# Altium PCB Lite Carrier for Mu.PcbDoc (part 11 of 15)
Units mm, origin at the board's own origin, x right, y up, seen from the top; angles counter-clockwise.
Board outline 146 x 102 mm, 20 copper layers (F.Cu, F.Mask, B.Cu, B.Mask, In1.Cu, F.SilkS, In2.Cu, B.SilkS, F.Adhes, B.Adhes, F.Paste, B.Paste, Dwgs.User, Cmts.User, Eco1.User, Eco2.User, Edge.Cuts, Margin, B.CrtYd, F.CrtYd); 254 components, 382 nets, 1258 pads, 1020 vias.
Unrouted connection lines stored in the file: 113.
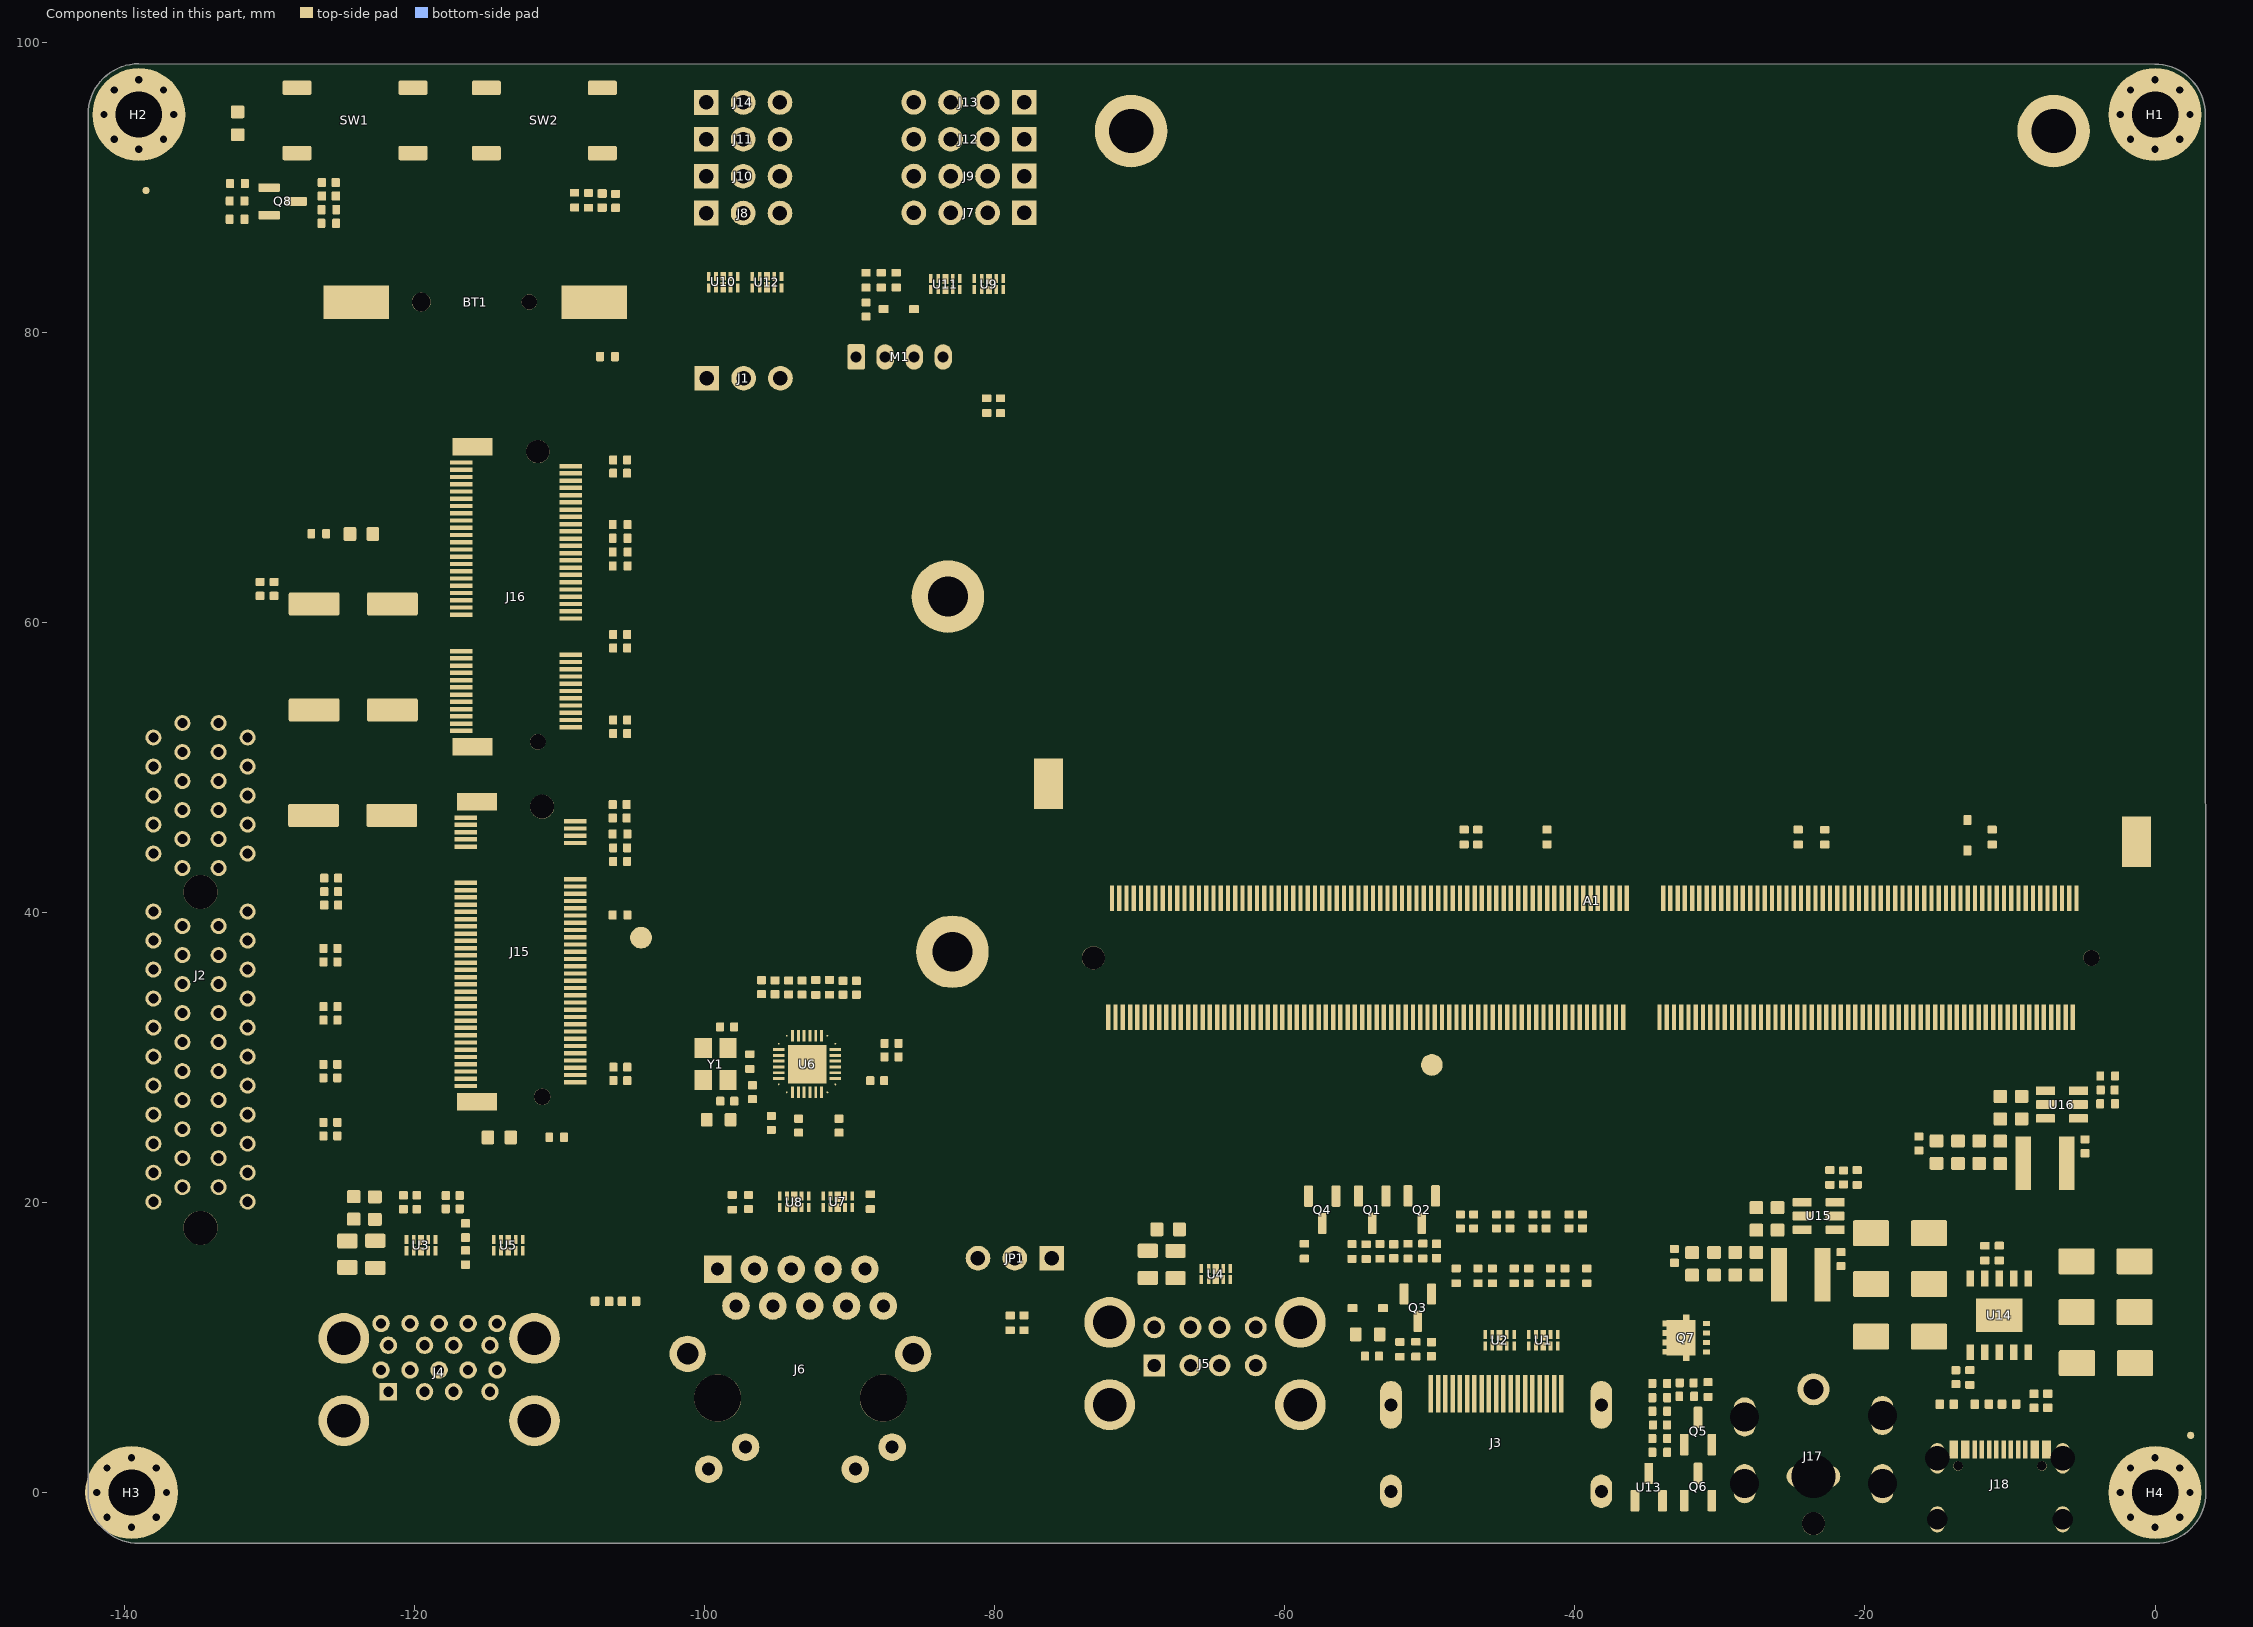
[diagram p21: the components of this part, seen from the top]

## Via types
v1: diameter 0.4, hole 0.2, F.Cu to B.Cu, tented both sides, 952 vias
v2: diameter 0.5, hole 0.3, F.Cu to B.Cu, tented both sides, 68 vias

## Nets (pads, with @x,y where several pads share a name; then routed paths per layer and width w, separated by ;. In a path a pad name is that pad's centre, name@x,y a point inside that pad or via, vN(x,y) a via of type N, cw(c..) or ccw(c..) an arc to the next point about the centre after c; other vN are vias at no path point) (continued)
copper on no net: | length 5303.1
  F.SilkS w0.254: -73.59,40.36 -73.59,97.36 -3.99,97.36 -3.99,40.36 -73.59,40.36
  B.SilkS w0.254: -91.788,51.904 -85.383,51.904 ; -91.788,52.631 -85.383,52.565 -91.788,52.499 ; -89.081,46.753 -88.09,46.819 -89.081,46.885 ; -89.081,48.338 -88.09,48.338 ; -89.081,49.064 -88.09,49.13 -89.081,49.197 ; -89.081,49.791 -88.09,49.791 ; -89.081,50.385 -88.09,50.385 ; -88.09,47.546 -89.081,47.612 ; -88.09,48.14 -89.081,48.206 ; -88.09,48.668 -89.081,48.602 ; -88.09,48.866 -89.081,48.932 ; -88.09,49.329 -89.081,49.395 ; -88.09,49.989 -89.081,50.055 ; -88.09,50.187 -89.081,50.253 ; -88.09,50.583 -89.081,50.649 ; -88.09,51.31 -89.081,51.376 -88.09,51.442 -89.081,51.508 ; -85.383,52.234 -91.788,52.168 ; -84.854,48.14 -83.864,48.206 -84.854,48.272 ; -84.854,48.932 -83.864,48.932 ; -84.854,51.046 -83.864,51.046 ; -84.524,52.432 -78.316,52.432 ; -84.392,46.885 -78.448,46.885 ; -84.392,52.499 -78.448,52.499 ; -84.26,46.819 -78.646,46.819 ; -84.26,52.565 -78.58,52.565 ; -83.996,52.631 -78.845,52.631 ; -83.93,46.753 -78.977,46.753 ; -83.864,47.876 -84.854,47.81 ; -83.864,48.074 -84.854,48.008 ; -83.864,49.13 -84.854,49.197 ; -83.864,49.725 -84.854,49.659 ; -83.864,49.923 -84.854,49.857 ; -83.864,51.376 -84.854,51.442 ; -83.864,51.838 -84.854,51.772 ; -82.873,44.772 -81.024,44.706 -82.873,44.64 -81.024,44.574 -81.354,44.574 ; -81.024,44.177 -81.354,44.244 ; -81.024,44.376 -81.354,44.442 ; -80.562,44.177 -80.165,44.111 -80.496,44.045 -78.713,44.045 -80.496,43.913 -78.713,43.847 -80.364,43.847 ; -80.165,44.244 -80.562,44.31 ; -80.165,44.442 -80.562,44.508 ; -80.165,44.904 -78.713,44.904 ; -80.099,43.253 -80.628,43.187 ; -80.033,44.64 -80.496,44.64 -78.713,44.64 -79.043,44.64 -78.713,44.574 ; -79.043,43.121 -78.713,43.121 ; -78.977,47.744 -77.986,47.744 ; -78.977,48.602 -77.986,48.536 -78.977,48.47 ; -78.977,49.593 -77.986,49.593 ; -78.977,51.112 -77.986,51.178 -78.977,51.244 ; -78.713,43.319 -79.043,43.385 ; -78.713,43.517 -79.043,43.583 -78.713,43.649 -79.043,43.715 ; -78.713,44.244 -79.043,44.177 ; -78.118,43.451 -77.788,43.451 ; -78.118,43.913 -77.788,43.913 ; -78.118,44.31 -77.788,44.244 -78.118,44.177 ; -78.118,44.904 -77.788,44.838 -78.118,44.772 ; -78.052,51.838 -78.977,51.772 ; -77.986,48.338 -78.977,48.272 ; -77.986,48.668 -78.977,48.734 ; -77.986,49.395 -78.977,49.329 ; -77.986,51.376 -78.977,51.442 ; -77.854,43.121 -76.401,43.121 ; -77.788,44.508 -78.118,44.442 ; -77.194,51.376 -76.137,51.376 ; -77.128,51.838 -75.807,51.838 ; -76.731,46.951 -71.118,46.885 -76.533,46.885 ; -76.731,52.499 -71.118,52.499 -76.929,52.366 ; -76.599,49.923 -71.118,49.923 ; -76.599,52.565 -71.118,52.631 -76.335,52.631 ; -76.533,49.725 -71.118,49.659 -76.731,49.659 -71.118,49.593 ; -76.533,70.395 -73.826,70.395 ; -76.467,43.517 -77.788,43.385 -78.118,43.319 -76.203,43.319 -76.467,43.385 -76.137,43.451 ; -76.467,49.857 -71.118,49.791 -76.335,49.791 ; -76.401,46.819 -71.118,46.819 -76.005,46.753 ; -76.269,71.65 -74.75,71.716 -76.137,71.716 -74.882,71.782 ; -76.203,48.932 -77.194,48.998 ; -76.137,43.583 -76.467,43.649 ; -76.137,44.177 -76.467,44.111 -76.137,44.045 -76.467,43.979 ; -76.137,44.64 -76.467,44.574 ; -76.137,47.81 -77.194,47.744 ; -76.137,50.715 -77.194,50.781 ; -76.137,51.178 -77.194,51.112 ; -76.071,49.263 -77.062,49.329 ; -75.939,47.612 -77.194,47.612 -71.118,47.546 ; -75.939,69.801 -75.014,69.801 ; -75.939,71.848 -75.014,71.848 ; -75.807,50.253 -76.995,50.187 -71.118,50.187 -72.109,50.319 ; -75.807,69.735 -75.146,69.735 ; -75.807,71.914 -75.146,71.914 ; -75.08,43.385 -74.684,43.385 ; -75.08,43.649 -74.684,43.715 -75.08,43.781 ; -75.08,44.111 -74.684,44.177 -75.08,44.244 ; -75.08,44.574 -74.684,44.574 ; -74.882,69.867 -76.137,69.933 -73.033,69.933 ; -74.684,43.583 -75.08,43.517 ; -74.684,43.913 -75.08,43.979 ; -74.684,44.376 -75.08,44.442 ; -74.684,69.867 -72.901,69.867 ; -74.354,69.669 -58.24,69.669 -74.552,69.801 -58.042,69.801 ; -74.354,71.056 -76.599,70.99 ; -74.222,69.603 -58.372,69.603 ; -73.958,70.461 -76.533,70.461 -74.156,70.593 -76.599,70.66 ; -73.892,44.64 -75.873,44.706 ; -73.693,69.273 -58.967,69.273 -73.561,69.207 ; -73.627,44.111 -73.297,44.177 -73.627,44.244 ; -73.627,44.376 -73.297,44.376 ; -73.627,44.772 -73.297,44.772 ; -73.363,43.121 -71.91,43.121 ; -73.297,43.517 -73.627,43.583 ; -73.297,43.847 -73.627,43.781 ; -73.297,44.045 -73.627,43.979 ; -73.297,44.574 -73.627,44.64 ; -73.297,62.405 -69.665,62.405 ; -73.297,62.603 -70.325,62.603 ; -73.297,62.801 -70.986,62.801 ; -73.297,62.999 -71.58,62.999 ; -73.297,63.197 -72.109,63.197 ; -73.297,64.122 -72.439,64.122 ; -73.297,64.716 -72.439,64.716 ; -73.297,65.376 -72.439,65.376 ; -73.297,65.64 -72.439,65.574 -73.297,65.508 ; -73.297,67.159 -59.363,67.159 ; -73.297,67.886 -59.363,67.82 -73.297,67.754 ; -73.297,68.15 -59.363,68.084 -73.297,68.018 ; -73.297,68.414 -59.363,68.48 -73.297,68.546 ; -73.297,68.81 -59.363,68.81 ; -73.297,70.065 -76.269,69.999 -73.165,69.999 ; -73.033,61.414 -59.627,61.414 -65.901,61.48 ; -72.901,61.282 -59.891,61.216 -72.769,61.216 -59.759,61.348 ; -72.769,69.867 -59.891,69.867 ; -72.637,61.15 -60.023,61.15 ; -72.439,63.791 -73.297,63.857 ; -72.439,64.914 -73.297,64.848 ; -72.439,65.971 -73.297,65.905 ; -72.439,70.065 -60.221,70.065 -72.637,69.933 -60.023,69.933 ; -72.109,48.404 -71.118,48.47 -72.109,48.536 ; -72.109,51.31 -71.118,51.376 -72.109,51.442 ; -72.109,60.82 -60.618,60.82 -71.976,60.754 ; -72.109,70.263 -60.552,70.263 ; -71.976,43.715 -71.646,43.715 ; -71.976,44.904 -71.646,44.904 ; -71.976,63.131 -73.297,63.131 -71.778,63.065 ; -71.976,70.329 -60.684,70.329 ; -71.712,43.187 -73.561,43.253 ; -71.646,43.385 -71.976,43.451 ; -71.646,44.177 -71.976,44.111 ; -71.646,44.376 -71.976,44.31 ; -71.646,44.706 -71.976,44.772 ; -71.646,60.555 -61.146,60.489 -71.514,60.489 ; -71.646,70.527 -61.014,70.527 -71.844,70.395 -60.816,70.395 ; -71.514,70.593 -61.146,70.593 ; -71.382,62.933 -73.297,62.933 -71.184,62.867 ; -71.184,60.291 -61.476,60.291 ; -71.184,70.792 -61.476,70.792 ; -71.118,47.149 -76.863,47.083 ; -71.118,47.347 -77.128,47.413 ; -71.118,49.064 -72.109,49.13 ; -71.118,49.263 -72.109,49.329 ; -71.118,50.121 -76.863,50.055 ; -71.118,50.98 -72.109,50.914 ; -71.118,51.838 -72.109,51.772 ; -71.052,60.225 -61.608,60.225 ; -71.052,70.858 -61.608,70.858 ; -70.788,62.735 -73.297,62.669 -70.524,62.669 ; -70.722,60.027 -61.938,60.027 ; -70.722,71.056 -61.938,71.056 ; -70.59,59.961 -62.07,59.961 ; -70.59,71.122 -62.07,71.122 ; -70.325,49.064 -69.335,49.13 -70.325,49.197 ; -70.325,49.857 -69.335,49.857 ; -70.325,51.046 -69.335,51.112 -70.325,51.178 -69.335,51.244 -70.325,51.31 ; -70.259,47.876 -69.335,47.876 ; -70.259,59.763 -62.401,59.763 ; -70.259,71.32 -62.401,71.32 ; -70.193,52.102 -63.589,52.168 -70.127,52.234 ; -70.127,59.697 -62.533,59.697 ; -70.127,62.537 -73.297,62.537 -69.929,62.471 ; -70.127,71.386 -62.533,71.386 ; -70.061,47.083 -63.655,47.083 ; -69.995,52.366 -63.721,52.366 ; -69.929,43.121 -69.599,43.187 -69.929,43.253 ; -69.929,44.111 -69.599,44.111 -70.722,44.045 -69.599,43.979 ; -69.797,46.885 -63.92,46.885 ; -69.797,59.499 -62.863,59.499 ; -69.731,52.565 -63.986,52.565 ; -69.665,46.819 -64.052,46.819 ; -69.599,43.385 -69.929,43.451 ; -69.599,71.716 -63.193,71.782 -69.467,71.782 ; -69.533,62.338 -73.297,62.338 -69.269,62.272 ; -69.467,59.301 -63.193,59.301 -69.599,59.367 -62.995,59.433 ; -69.401,52.631 -64.316,52.631 ; -69.335,46.753 -64.382,46.753 ; -69.335,48.074 -70.259,48.008 ; -69.335,48.404 -70.325,48.47 ; -69.335,48.998 -70.325,48.932 ; -69.335,49.329 -70.325,49.395 ; -69.335,49.527 -70.325,49.593 ; -69.335,50.055 -70.325,49.989 ; -69.335,50.649 -70.325,50.583 ; -69.335,50.98 -70.325,50.914 ; -69.335,51.706 -70.259,51.64 ; -69.335,59.235 -63.325,59.235 ; -69.335,71.848 -63.325,71.848 ; -69.071,62.206 -73.297,62.206 -68.873,62.14 ; -69.005,59.036 -63.655,59.036 -69.137,59.103 -63.457,59.169 ; -69.005,72.046 -63.589,71.98 -69.137,71.98 -63.457,71.914 ; -68.674,58.838 -64.052,58.838 -68.542,58.772 ; -68.674,62.074 -73.297,62.008 -68.41,62.008 ; -68.674,72.244 -63.986,72.244 ; -68.542,72.311 -64.118,72.311 ; -68.278,61.942 -73.297,61.876 -68.014,61.876 ; -68.212,58.574 -64.514,58.574 -68.08,58.508 ; -68.212,72.509 -64.448,72.509 -68.344,72.443 -64.25,72.377 ; -68.08,72.575 -64.58,72.575 ; -67.882,44.64 -66.033,44.64 -66.429,44.574 ; -67.816,61.81 -73.231,61.744 -67.618,61.744 ; -67.75,58.31 -64.91,58.31 ; -67.75,72.773 -64.91,72.773 ; -67.618,58.244 -65.042,58.244 ; -67.618,72.839 -65.042,72.839 ; -67.42,61.678 -73.165,61.612 -67.156,61.612 ; -67.288,43.913 -66.033,43.913 ; -67.288,58.046 -65.372,58.046 ; -67.288,73.037 -65.372,73.037 ; -67.156,75.282 -65.505,75.282 ; -66.957,57.848 -65.703,57.848 ; -66.957,61.546 -73.099,61.546 -66.759,61.48 ; -66.957,73.235 -65.703,73.235 -67.089,73.169 -65.505,73.103 ; -66.825,57.782 -65.835,57.782 ; -66.825,73.301 -65.835,73.301 ; -66.759,74.292 -65.901,74.226 -66.759,74.16 ; -66.759,77.131 -65.901,77.131 ; -66.693,57.716 -66.033,57.716 ; -66.561,77.197 -66.099,77.197 ; -66.429,43.715 -66.033,43.715 ; -66.033,43.517 -66.429,43.583 ; -66.033,44.111 -67.288,44.045 ; -65.901,73.895 -66.759,73.829 ; -65.901,74.358 -66.759,74.424 ; -65.901,74.952 -66.759,74.886 ; -65.769,77.065 -66.957,76.999 -65.637,76.999 -67.156,76.867 ; -65.703,61.546 -59.561,61.546 -65.505,61.612 ; -65.505,43.385 -65.174,43.385 ; -65.505,43.781 -65.174,43.847 -65.505,43.913 -63.391,43.847 -63.721,43.847 -65.174,43.715 ; -65.505,43.979 -63.391,44.045 -65.505,44.111 -63.391,44.177 -63.721,44.177 ; -65.505,44.838 -65.174,44.838 ; -65.372,75.48 -67.354,75.546 ; -65.372,76.735 -67.288,76.669 -65.306,76.603 -67.354,76.537 ; -65.306,61.678 -59.495,61.678 ; -65.24,75.811 -67.42,75.877 ; -65.24,76.405 -67.42,76.339 ; -65.174,44.31 -65.505,44.376 ; -65.174,44.64 -65.505,44.706 ; -65.108,61.744 -59.429,61.744 -64.844,61.81 ; -64.646,61.876 -59.363,61.942 -64.448,61.942 ; -64.382,47.612 -63.457,47.546 -70.259,47.546 -69.335,47.612 -70.259,47.744 ; -64.382,48.998 -63.391,48.998 ; -64.382,49.263 -63.391,49.329 -64.382,49.395 ; -64.382,49.527 -63.391,49.527 ; -64.382,51.178 -63.391,51.178 ; -64.382,58.64 -68.41,58.706 -64.25,58.706 ; -64.25,62.008 -59.363,62.074 -63.986,62.074 ; -63.92,58.904 -68.807,58.904 -63.787,58.97 ; -63.787,62.14 -59.363,62.206 -63.589,62.206 ; -63.523,52.036 -70.193,51.97 ; -63.457,47.942 -64.382,48.008 ; -63.457,51.838 -64.382,51.772 ; -63.391,43.649 -63.721,43.583 ; -63.391,44.244 -63.721,44.31 ; -63.391,44.706 -63.721,44.64 ; -63.391,48.404 -64.382,48.338 ; -63.391,49.197 -64.382,49.13 ; -63.391,49.857 -64.382,49.923 ; -63.391,50.319 -64.382,50.253 ; -63.391,50.517 -64.382,50.451 ; -63.391,50.98 -64.382,50.914 ; -63.391,51.376 -64.382,51.31 ; -63.391,62.272 -59.363,62.272 -63.193,62.338 ; -63.193,46.753 -61.608,46.819 -63.061,46.819 -61.542,46.885 ; -63.127,44.64 -61.146,44.64 ; -62.995,62.405 -59.363,62.405 -62.731,62.471 ; -62.995,71.65 -69.797,71.584 -62.863,71.584 ; -62.929,46.951 -61.41,47.017 -62.797,47.083 ; -62.599,49.923 -61.476,49.989 -62.599,50.055 ; -62.533,62.537 -59.363,62.537 ; -62.467,49.461 -56.589,49.461 ; -62.335,62.603 -59.363,62.603 -62.136,62.669 ; -62.269,43.517 -61.938,43.517 ; -62.203,52.499 -56.589,52.499 ; -62.136,49.197 -56.589,49.263 -62.335,49.329 ; -62.07,52.565 -56.589,52.565 -61.806,52.631 ; -62.004,49.13 -56.589,49.13 -61.74,49.064 ; -61.938,44.244 -62.269,44.177 ; -61.938,44.442 -62.269,44.376 ; -61.872,62.735 -59.363,62.801 -61.74,62.801 ; -61.806,47.942 -60.552,47.876 -61.938,47.81 ; -61.674,48.008 -60.353,48.008 ; -61.608,50.319 -62.599,50.385 ; -61.608,50.517 -62.599,50.583 -61.608,50.649 -62.599,50.715 ; -61.608,50.848 -62.599,50.914 ; -61.608,51.046 -62.599,51.112 ; -61.542,51.64 -62.599,51.574 ; -61.476,62.867 -59.363,62.867 -61.278,62.933 ; -61.344,49.857 -62.599,49.857 -56.589,49.857 -57.58,49.857 ; -61.344,51.838 -62.599,51.772 ; -61.212,47.215 -62.533,47.281 ; -61.08,62.999 -59.363,63.065 -60.882,63.065 ; -61.014,47.413 -62.335,47.479 ; -60.948,60.621 -71.778,60.621 -60.816,60.687 ; -60.882,48.734 -59.627,48.734 -60.75,48.8 ; -60.684,63.131 -59.363,63.197 -60.552,63.197 ; -60.485,60.886 -72.241,60.886 -60.353,60.952 ; -60.419,63.263 -59.363,63.263 ; -60.287,63.527 -59.363,63.461 -60.287,63.395 ; -60.287,64.848 -59.363,64.914 -60.287,64.98 ; -60.287,65.376 -59.363,65.376 ; -59.759,43.319 -57.91,43.253 -59.759,43.187 ; -59.693,44.64 -57.91,44.574 -58.24,44.574 ; -59.693,44.904 -57.91,44.904 ; -59.693,69.867 -57.91,69.867 -56.523,69.867 ; -59.561,69.933 -56.457,69.933 -59.429,69.999 -56.259,70.131 -59.231,70.131 ; -59.363,48.998 -60.618,48.932 ; -59.363,63.725 -60.287,63.659 ; -59.363,64.32 -60.287,64.386 ; -59.363,64.65 -60.287,64.716 ; -59.363,65.574 -60.287,65.508 ; -59.363,65.773 -60.287,65.707 ; -59.363,65.971 -60.287,66.037 ; -59.363,66.169 -73.297,66.235 ; -59.363,66.499 -73.297,66.565 ; -59.363,66.829 -73.297,66.895 ; -59.363,67.49 -73.297,67.424 ; -59.363,68.348 -73.297,68.282 ; -59.165,69.141 -73.429,69.141 -59.297,69.075 -73.297,68.942 ; -59.099,43.913 -57.91,43.847 -58.24,43.847 ; -59.099,70.197 -56.259,70.197 ; -58.834,69.339 -73.826,69.339 -58.702,69.405 ; -58.768,70.395 -56.127,70.395 ; -58.438,70.593 -56.061,70.593 -58.306,70.66 -56.061,70.726 ; -58.24,43.385 -57.91,43.451 -58.24,43.517 ; -58.24,44.177 -57.91,44.111 -59.099,44.045 ; -57.91,43.649 -58.24,43.715 ; -57.91,44.376 -58.24,44.442 ; -57.91,44.706 -59.693,44.772 ; -57.712,69.801 -56.655,69.801 ; -57.646,44.904 -57.316,44.838 -57.58,44.772 ; -57.58,47.083 -56.589,47.149 -57.58,47.215 ; -57.58,48.866 -56.589,48.866 ; -57.58,51.178 -56.589,51.178 ; -57.58,51.838 -56.589,51.838 -62.599,51.904 -56.589,52.036 -62.533,52.102 ; -57.58,69.735 -56.787,69.735 ; -57.58,71.848 -56.787,71.848 ; -57.382,71.914 -57.051,71.914 ; -57.25,69.669 -57.117,69.669 ; -57.183,44.64 -57.514,44.574 ; -56.985,44.31 -57.316,44.244 ; -56.655,71.782 -57.844,71.716 ; -56.589,47.017 -57.58,46.951 ; -56.589,47.612 -57.58,47.546 ; -56.589,47.81 -57.58,47.876 ; -56.589,48.272 -57.58,48.206 ; -56.589,48.47 -57.58,48.536 ; -56.589,48.668 -57.58,48.734 ; -56.589,49.923 -57.58,49.989 ; -56.589,51.64 -57.58,51.706 ; -56.259,71.452 -58.042,71.518 ; -56.193,71.254 -58.24,71.188 ; -56.061,43.781 -56.325,43.847 ; -56.061,70.924 -58.306,70.858 ; -55.929,43.979 -56.259,44.045 ; -55.731,44.904 -55.4,44.904 ; -55.599,44.574 -55.929,44.64 ; -55.136,43.253 -54.806,43.253 ; -55.136,44.838 -54.806,44.772 -55.136,44.706 ; -54.806,43.715 -55.136,43.649 ; -54.806,43.913 -55.136,43.979 ; -54.806,44.244 -55.136,44.177 ; -54.806,44.442 -55.136,44.376 ; -54.806,49.263 -49.325,49.197 -54.806,49.13 ; -54.806,49.923 -49.325,49.923 ; -54.806,50.187 -49.325,50.253 -51.174,50.253 -49.325,50.319 -49.325,50.121 ; -54.476,43.121 -54.014,43.121 ; -54.278,44.376 -53.948,44.442 -54.278,44.508 -53.948,44.574 -54.278,44.64 -53.815,44.64 ; -54.278,44.706 -52.495,44.772 -54.212,44.838 -52.495,44.904 -53.948,44.904 ; -53.815,43.319 -54.344,43.253 ; -53.485,43.649 -53.815,43.715 ; -52.825,44.442 -52.495,44.508 -52.825,44.574 ; -52.495,43.121 -52.825,43.187 ; -52.495,43.319 -52.825,43.385 ; -52.495,43.781 -52.825,43.715 ; -52.495,44.376 -52.825,44.31 ; -51.834,43.583 -51.438,43.517 -51.834,43.517 -51.24,43.451 ; -51.834,44.442 -51.372,44.508 -51.834,44.508 -51.24,44.574 ; -51.702,43.385 -50.976,43.385 ; -51.57,43.781 -51.9,43.715 ; -51.57,44.244 -51.9,44.31 ; -51.57,44.772 -49.787,44.772 -51.372,44.838 ; -51.372,43.187 -49.787,43.121 -51.108,43.121 ; -51.174,47.546 -49.325,47.546 ; -51.174,50.385 -49.325,50.451 -51.174,50.517 ; -51.174,50.848 -49.325,50.848 ; -50.91,44.904 -49.787,44.904 ; -50.117,43.913 -49.787,43.913 ; -49.325,47.149 -51.174,47.083 ; -49.325,47.347 -51.174,47.281 ; -49.325,47.876 -51.174,47.81 ; -49.325,48.074 -51.174,48.14 ; -49.325,48.668 -51.174,48.602 ; -49.325,48.998 -54.806,48.932 ; -49.325,49.329 -54.806,49.395 ; -49.325,50.649 -51.174,50.715 ; -49.325,51.31 -55.797,51.376 ; -49.325,51.64 -55.797,51.706 -49.325,51.772 -55.797,51.838 ; -49.325,52.366 -55.797,52.3 ; -48.532,49.329 -46.617,49.329 ; -48.334,50.914 -46.089,50.98 -48.268,50.98 -45.957,51.046 ; -48.202,48.272 -45.362,48.272 ; -47.211,52.168 -40.872,52.168 -47.079,52.234 ; -47.145,47.215 -40.872,47.215 -47.277,47.281 -40.872,47.347 ; -47.013,47.149 -40.872,47.083 -46.881,47.083 ; -46.947,52.3 -40.872,52.3 ; -46.749,47.017 -40.872,47.017 ; -46.749,52.366 -40.872,52.432 -46.617,52.432 ; -46.551,46.951 -40.872,46.951 -46.287,46.885 ; -46.485,50.583 -48.4,50.649 ; -46.419,48.866 -48.4,48.8 ; -46.353,52.499 -40.872,52.565 -46.089,52.565 ; -46.089,48.536 -48.268,48.47 -45.957,48.47 ; -45.957,46.819 -40.872,46.753 -45.296,46.753 ; -45.825,48.404 -48.202,48.338 -45.626,48.338 ; -45.825,51.112 -48.268,51.112 -45.56,51.178 ; -45.626,52.631 -40.872,52.631 ; -45.164,51.244 -48.136,51.31 -40.872,51.31 -42.721,51.178 ; -44.57,48.206 -48.136,48.206 -40.872,48.14 ; -42.721,48.206 -40.872,48.272 -42.721,48.338 ; -42.721,48.8 -40.872,48.8 ; -40.872,47.678 -47.674,47.612 ; -40.872,48.602 -42.721,48.668 ; -40.872,50.055 -42.721,49.989 ; -40.872,50.385 -42.721,50.451 ; -40.872,50.715 -42.721,50.649 ; -40.872,50.914 -42.721,50.848 ; -91.788,52.168 -85.383,52.168 -91.788,52.168 ; -91.788,52.499 -85.383,52.499 -91.788,52.499 ; -89.081,46.885 -88.09,46.885 -89.081,46.885 ; -89.081,47.612 -88.09,47.612 -89.081,47.612 ; -89.081,48.206 -88.09,48.206 -89.081,48.206 ; -89.081,48.602 -88.09,48.602 -89.081,48.602 ; -89.081,48.932 -88.09,48.932 -89.081,48.932 ; -89.081,49.197 -88.09,49.197 -89.081,49.197 ; -89.081,49.395 -88.09,49.395 -89.081,49.395 ; -89.081,50.055 -88.09,50.055 -89.081,50.055 ; -89.081,50.253 -88.09,50.253 -89.081,50.253 ; -89.081,50.649 -88.09,50.649 -89.081,50.649 ; -89.081,51.508 -88.09,51.508 -89.081,51.508 ; -84.854,47.81 -83.864,47.81 -84.854,47.81 ; -84.854,48.008 -83.864,48.008 -84.854,48.008 ; -84.854,48.272 -83.864,48.272 -84.854,48.272 ; -84.854,49.197 -83.864,49.197 -84.854,49.197 ; -84.854,49.659 -83.864,49.659 -84.854,49.659 ; -84.854,49.857 -83.864,49.857 -84.854,49.857 ; -84.854,50.451 -83.864,50.583 -84.854,50.649 ; -84.854,50.451 -83.864,50.451 -84.854,50.451 ; -84.854,50.649 -83.864,50.649 -84.854,50.649 ; -84.854,51.442 -83.864,51.442 -84.854,51.442 ; -84.854,51.772 -83.864,51.772 -84.854,51.772 ; -84.788,47.479 -78.052,47.479 -84.788,47.479 ; -84.788,47.479 -78.052,47.413 -84.722,47.281 ; -84.722,47.281 -78.118,47.281 -84.722,47.281 ; -81.354,43.451 -81.024,43.451 -81.354,43.451 ; -81.354,43.451 -81.024,43.583 -81.354,43.649 ; -81.354,43.649 -81.024,43.649 -81.354,43.649 ; -81.354,44.244 -81.024,44.244 -81.354,44.244 ; -81.354,44.442 -81.024,44.442 -81.354,44.442 ; -80.628,43.187 -80.165,43.187 -80.628,43.187 ; -80.562,44.31 -80.165,44.31 -80.562,44.31 ; -80.562,44.508 -80.165,44.508 -80.562,44.508 ; -79.043,43.385 -78.713,43.385 -79.043,43.385 ; -79.043,43.715 -78.713,43.715 -79.043,43.715 ; -79.043,44.177 -78.713,44.177 -79.043,44.177 ; -78.977,48.272 -77.986,48.272 -78.977,48.272 ; -78.977,48.47 -77.986,48.47 -78.977,48.47 ; -78.977,48.734 -77.986,48.734 -78.977,48.734 ; -78.977,49.329 -77.986,49.329 -78.977,49.329 ; -78.977,49.989 -77.986,49.989 -78.977,49.989 ; -78.977,49.989 -77.986,50.055 -78.977,50.187 ; -78.977,50.187 -77.986,50.187 -78.977,50.187 ; -78.977,50.649 -77.986,50.781 -78.977,50.848 ; -78.977,50.649 -77.986,50.649 -78.977,50.649 ; -78.977,50.848 -77.986,50.848 -78.977,50.848 ; -78.977,51.244 -77.986,51.244 -78.977,51.244 ; -78.977,51.442 -77.986,51.442 -78.977,51.442 ; -78.977,51.772 -78.052,51.772 -78.977,51.772 ; -78.118,43.583 -77.788,43.715 -78.118,43.781 ; -78.118,43.583 -77.788,43.583 -78.118,43.583 ; -78.118,43.781 -77.788,43.781 -78.118,43.781 ; -78.118,44.177 -77.788,44.177 -78.118,44.177 ; -78.118,44.442 -77.788,44.442 -78.118,44.442 ; -78.118,44.772 -77.788,44.772 -78.118,44.772 ; -77.194,47.744 -76.071,47.744 -77.194,47.744 ; -77.194,47.942 -76.203,47.942 -77.194,47.942 ; -77.194,47.942 -76.203,48.074 -77.194,48.14 ; -77.194,48.14 -76.203,48.14 -77.194,48.14 ; -77.194,48.47 -76.203,48.47 -77.194,48.47 ; -77.194,48.47 -76.203,48.602 -77.194,48.668 ; -77.194,48.668 -76.203,48.668 -77.194,48.668 ; -77.194,48.998 -76.203,48.998 -77.194,48.998 ; -77.194,50.781 -76.137,50.781 -77.194,50.781 ; -77.194,51.112 -76.137,51.112 -77.194,51.112 ; -77.194,51.508 -76.137,51.508 -77.194,51.508 ; -77.194,51.508 -76.137,51.64 -77.194,51.706 ; -77.194,51.706 -76.071,51.706 -77.194,51.706 ; -77.128,47.413 -71.118,47.413 -77.128,47.413 ; -77.128,50.385 -76.071,50.385 -77.128,50.385 ; -77.128,50.385 -76.071,50.451 -77.128,50.583 ; -77.128,50.583 -76.137,50.583 -77.128,50.583 ; -77.128,51.97 -71.118,52.102 -77.062,52.168 ; -77.128,51.97 -71.118,51.97 -77.128,51.97 ; -77.062,49.329 -76.005,49.329 -77.062,49.329 ; -77.062,52.168 -71.118,52.168 -77.062,52.168 ; -76.929,52.366 -71.118,52.366 -76.929,52.366 ; -76.863,47.083 -71.118,47.083 -76.863,47.083 ; -76.863,50.055 -71.118,50.055 -76.863,50.055 ; -76.599,70.66 -74.288,70.66 -76.599,70.66 ; -76.599,70.99 -74.354,70.99 -76.599,70.99 ; -76.467,43.649 -76.137,43.649 -76.467,43.649 ; -76.467,43.979 -76.137,43.979 -76.467,43.979 ; -76.467,44.574 -76.137,44.574 -76.467,44.574 ; -76.467,71.32 -74.552,71.452 -76.335,71.518 ; -76.467,71.32 -74.486,71.32 -76.467,71.32 ; -76.335,71.518 -74.552,71.518 -76.335,71.518 ; -75.873,44.706 -73.892,44.706 -75.873,44.706 ; -75.08,43.517 -74.684,43.517 -75.08,43.517 ; -75.08,43.781 -74.684,43.781 -75.08,43.781 ; -75.08,43.979 -74.684,43.979 -75.08,43.979 ; -75.08,44.244 -74.684,44.244 -75.08,44.244 ; -75.08,44.442 -74.684,44.442 -75.08,44.442 ; -73.627,43.583 -73.297,43.583 -73.627,43.583 ; -73.627,43.781 -73.297,43.781 -73.627,43.781 ; -73.627,43.979 -73.297,43.979 -73.627,43.979 ; -73.627,44.244 -73.297,44.244 -73.627,44.244 ; -73.627,44.64 -73.297,44.64 -73.627,44.64 ; -73.561,43.253 -71.712,43.253 -73.561,43.253 ; -73.297,63.857 -72.439,63.857 -73.297,63.857 ; -73.297,64.254 -72.439,64.254 -73.297,64.254 ; -73.297,64.254 -72.439,64.32 -73.297,64.452 ; -73.297,64.452 -72.439,64.452 -73.297,64.452 ; -73.297,64.848 -72.439,64.848 -73.297,64.848 ; -73.297,65.046 -72.439,65.046 -73.297,65.046 ; -73.297,65.046 -72.439,65.112 -73.297,65.244 ; -73.297,65.244 -72.439,65.244 -73.297,65.244 ; -73.297,65.508 -72.439,65.508 -73.297,65.508 ; -73.297,65.905 -72.439,65.905 -73.297,65.905 ; -73.297,66.235 -59.363,66.235 -73.297,66.235 ; -73.297,66.565 -59.363,66.565 -73.297,66.565 ; -73.297,66.895 -59.363,66.895 -73.297,66.895 ; -73.297,67.424 -59.363,67.424 -73.297,67.424 ; -73.297,67.754 -59.363,67.754 -73.297,67.754 ; -73.297,68.018 -59.363,68.018 -73.297,68.018 ; -73.297,68.282 -59.363,68.282 -73.297,68.282 ; -73.297,68.546 -59.363,68.546 -73.297,68.546 ; -73.297,68.942 -59.363,68.942 -73.297,68.942 ; -72.109,48.074 -71.118,48.206 -72.109,48.272 ; -72.109,48.074 -71.118,48.074 -72.109,48.074 ; -72.109,48.272 -71.118,48.272 -72.109,48.272 ; -72.109,48.536 -71.118,48.536 -72.109,48.536 ; -72.109,49.13 -71.118,49.13 -72.109,49.13 ; -72.109,49.329 -71.118,49.329 -72.109,49.329 ; -72.109,50.319 -71.118,50.319 -72.109,50.319 ; -72.109,50.914 -71.118,50.914 -72.109,50.914 ; -72.109,51.442 -71.118,51.442 -72.109,51.442 ; -72.109,51.772 -71.118,51.772 -72.109,51.772 ; -71.976,43.451 -71.646,43.451 -71.976,43.451 ; -71.976,44.111 -71.646,44.111 -71.976,44.111 ; -71.976,44.31 -71.646,44.31 -71.976,44.31 ; -71.976,44.772 -71.646,44.772 -71.976,44.772 ; -71.382,44.706 -69.599,44.706 -71.382,44.706 ; -71.382,44.706 -69.599,44.574 -69.929,44.508 ; -70.325,48.47 -69.335,48.47 -70.325,48.47 ; -70.325,48.932 -69.335,48.932 -70.325,48.932 ; -70.325,49.197 -69.335,49.197 -70.325,49.197 ; -70.325,49.395 -69.335,49.395 -70.325,49.395 ; -70.325,49.593 -69.335,49.593 -70.325,49.593 ; -70.325,49.989 -69.335,49.989 -70.325,49.989 ; -70.325,50.187 -69.335,50.187 -70.325,50.187 ; -70.325,50.187 -69.335,50.253 -70.325,50.385 ; -70.325,50.385 -69.335,50.385 -70.325,50.385 ; -70.325,50.583 -69.335,50.583 -70.325,50.583 ; -70.325,50.914 -69.335,50.914 -70.325,50.914 ; -70.325,51.31 -69.335,51.31 -70.325,51.31 ; -70.259,47.744 -69.335,47.744 -70.259,47.744 ; -70.259,48.008 -69.335,48.008 -70.259,48.008 ; -70.259,51.64 -69.335,51.64 -70.259,51.64 ; -70.193,47.413 -63.523,47.347 -70.127,47.215 ; -70.193,47.413 -63.523,47.413 -70.193,47.413 ; -70.193,51.97 -63.523,51.97 -70.193,51.97 ; -70.127,47.215 -63.589,47.215 -70.127,47.215 ; -70.127,52.234 -63.589,52.234 -70.127,52.234 ; -69.929,43.253 -69.599,43.253 -69.929,43.253 ; -69.929,43.451 -69.599,43.451 -69.929,43.451 ; -69.929,44.508 -69.599,44.508 -69.929,44.508 ; -67.42,75.877 -65.24,75.877 -67.42,75.877 ; -67.42,76.339 -65.24,76.339 -67.42,76.339 ; -67.354,75.546 -65.372,75.546 -67.354,75.546 ; -67.354,76.537 -65.306,76.537 -67.354,76.537 ; -67.288,44.045 -66.033,44.045 -67.288,44.045 ; -67.156,76.867 -65.505,76.867 -67.156,76.867 ; -66.759,73.433 -65.901,73.433 -66.759,73.433 ; -66.759,73.433 -65.901,73.499 -66.759,73.631 ; -66.759,73.631 -65.901,73.631 -66.759,73.631 ; -66.759,73.829 -65.901,73.829 -66.759,73.829 ; -66.759,74.16 -65.901,74.16 -66.759,74.16 ; -66.759,74.424 -65.901,74.424 -66.759,74.424 ; -66.759,74.886 -65.901,74.886 -66.759,74.886 ; -66.429,43.583 -66.033,43.583 -66.429,43.583 ; -65.505,44.376 -65.174,44.376 -65.505,44.376 ; -65.505,44.706 -65.174,44.706 -65.505,44.706 ; -64.382,48.008 -63.391,48.008 -64.382,48.008 ; -64.382,48.338 -63.391,48.338 -64.382,48.338 ; -64.382,49.13 -63.391,49.13 -64.382,49.13 ; -64.382,49.395 -63.391,49.395 -64.382,49.395 ; -64.382,49.923 -63.391,49.923 -64.382,49.923 ; -64.382,50.253 -63.391,50.253 -64.382,50.253 ; -64.382,50.451 -63.391,50.451 -64.382,50.451 ; -64.382,50.914 -63.391,50.914 -64.382,50.914 ; -64.382,51.31 -63.391,51.31 -64.382,51.31 ; -64.382,51.772 -63.457,51.772 -64.382,51.772 ; -63.721,43.583 -63.391,43.583 -63.721,43.583 ; -63.721,44.31 -63.391,44.31 -63.721,44.31 ; -63.721,44.64 -63.391,44.64 -63.721,44.64 ; -62.797,47.083 -61.344,47.083 -62.797,47.083 ; -62.599,50.055 -61.542,50.055 -62.599,50.055 ; -62.599,50.385 -61.608,50.385 -62.599,50.385 ; -62.599,50.715 -61.608,50.715 -62.599,50.715 ; -62.599,50.914 -61.608,50.914 -62.599,50.914 ; -62.599,51.112 -61.608,51.112 -62.599,51.112 ; -62.599,51.574 -61.542,51.574 -62.599,51.574 ; -62.599,51.772 -61.476,51.772 -62.599,51.772 ; -62.533,47.281 -61.146,47.281 -62.533,47.281 ; -62.533,52.102 -56.589,52.102 -62.533,52.102 ; -62.335,47.479 -60.948,47.479 -62.335,47.479 ; -62.335,49.329 -56.589,49.329 -62.335,49.329 ; -62.269,43.649 -61.938,43.649 -62.269,43.649 ; -62.269,43.649 -61.938,43.715 -62.269,43.847 ; -62.269,43.847 -61.938,43.847 -62.269,43.847 ; -62.269,44.177 -61.938,44.177 -62.269,44.177 ; -62.269,44.376 -61.938,44.376 -62.269,44.376 ; -61.938,47.81 -60.618,47.81 -61.938,47.81 ; -61.542,48.14 -60.221,48.14 -61.542,48.14 ; -61.542,48.14 -60.155,48.206 -61.344,48.338 -59.957,48.404 -61.212,48.404 -59.891,48.47 -61.014,48.602 ; -61.014,48.602 -59.759,48.602 -61.014,48.602 ; -60.618,48.932 -59.429,48.932 -60.618,48.932 ; -60.287,63.395 -59.363,63.395 -60.287,63.395 ; -60.287,63.659 -59.363,63.659 -60.287,63.659 ; -60.287,63.857 -59.363,63.857 -60.287,63.857 ; -60.287,63.857 -59.363,63.989 -60.287,64.056 -59.363,64.122 -60.287,64.188 ; -60.287,64.188 -59.363,64.188 -60.287,64.188 ; -60.287,64.386 -59.363,64.386 -60.287,64.386 ; -60.287,64.716 -59.363,64.716 -60.287,64.716 ; -60.287,64.98 -59.363,64.98 -60.287,64.98 ; -60.287,65.508 -59.363,65.508 -60.287,65.508 ; -60.287,65.707 -59.363,65.707 -60.287,65.707 ; -60.287,66.037 -59.363,66.037 -60.287,66.037 ; -59.759,43.187 -57.91,43.187 -59.759,43.187 ; -59.693,44.772 -57.91,44.772 -59.693,44.772 ; -59.099,44.045 -57.91,44.045 -59.099,44.045 ; -58.306,70.858 -56.061,70.858 -58.306,70.858 ; -58.24,43.517 -57.91,43.517 -58.24,43.517 ; -58.24,43.715 -57.91,43.715 -58.24,43.715 ; -58.24,44.442 -57.91,44.442 -58.24,44.442 ; -58.24,71.188 -56.127,71.188 -58.24,71.188 ; -58.042,71.518 -56.325,71.518 -58.042,71.518 ; -57.844,71.716 -56.523,71.716 -57.844,71.716 ; -57.58,44.772 -57.25,44.772 -57.58,44.772 ; -57.58,46.951 -56.589,46.951 -57.58,46.951 ; -57.58,47.215 -56.589,47.215 -57.58,47.215 ; -57.58,47.546 -56.589,47.546 -57.58,47.546 ; -57.58,47.876 -56.589,47.876 -57.58,47.876 ; -57.58,48.206 -56.589,48.206 -57.58,48.206 ; -57.58,48.536 -56.589,48.536 -57.58,48.536 ; -57.58,48.734 -56.589,48.734 -57.58,48.734 ; -57.58,49.989 -56.589,49.989 -57.58,49.989 ; -57.58,50.187 -56.589,50.187 -57.58,50.187 ; -57.58,50.187 -56.589,50.319 -57.58,50.385 ; -57.58,50.385 -56.589,50.385 -57.58,50.385 ; -57.58,51.706 -56.589,51.706 -57.58,51.706 ; -57.514,44.574 -57.117,44.574 -57.514,44.574 ; -57.316,44.244 -56.985,44.244 -57.316,44.244 ; -56.325,43.847 -55.995,43.847 -56.325,43.847 ; -56.259,44.045 -55.863,44.045 -56.259,44.045 ; -55.929,44.64 -55.532,44.64 -55.929,44.64 ; -55.797,51.376 -49.325,51.376 -55.797,51.376 ; -55.797,51.838 -49.325,51.838 -55.797,51.838 ; -55.797,52.3 -49.325,52.3 -55.797,52.3 ; -55.136,43.649 -54.806,43.649 -55.136,43.649 ; -55.136,43.979 -54.806,43.979 -55.136,43.979 ; -55.136,44.177 -54.806,44.177 -55.136,44.177 ; -55.136,44.376 -54.806,44.376 -55.136,44.376 ; -55.136,44.706 -54.806,44.706 -55.136,44.706 ; -54.806,48.932 -49.325,48.932 -54.806,48.932 ; -54.806,49.13 -49.325,49.13 -54.806,49.13 ; -54.806,49.395 -49.325,49.395 -54.806,49.395 ; -54.344,43.253 -53.881,43.253 -54.344,43.253 ; -53.815,43.715 -53.419,43.715 -53.815,43.715 ; -52.825,43.187 -52.495,43.187 -52.825,43.187 ; -52.825,43.385 -52.495,43.385 -52.825,43.385 ; -52.825,43.715 -52.495,43.715 -52.825,43.715 ; -52.825,44.31 -52.495,44.31 -52.825,44.31 ; -52.825,44.574 -52.495,44.574 -52.825,44.574 ; -51.9,43.715 -51.57,43.715 -51.9,43.715 ; -51.9,44.31 -51.57,44.31 -51.9,44.31 ; -51.174,47.083 -49.325,47.083 -51.174,47.083 ; -51.174,47.281 -49.325,47.281 -51.174,47.281 ; -51.174,47.81 -49.325,47.81 -51.174,47.81 ; -51.174,48.14 -49.325,48.14 -51.174,48.14 ; -51.174,48.602 -49.325,48.602 -51.174,48.602 ; -51.174,50.517 -49.325,50.517 -51.174,50.517 ; -51.174,50.715 -49.325,50.715 -51.174,50.715 ; -50.117,43.451 -49.787,43.451 -50.117,43.451 ; -50.117,43.451 -49.787,43.583 -50.117,43.649 ; -50.117,43.649 -49.787,43.649 -50.117,43.649 ; -50.117,44.045 -49.787,44.111 -50.117,44.244 ; -50.117,44.045 -49.787,44.045 -50.117,44.045 ; -50.117,44.244 -49.787,44.244 -50.117,44.244 ; -48.466,48.998 -46.485,48.998 -48.466,48.998 ; -48.466,48.998 -46.485,49.064 -48.466,49.197 ; -48.466,49.197 -46.551,49.197 -48.466,49.197 ; -48.4,48.8 -46.353,48.8 -48.4,48.8 ; -48.4,50.649 -46.419,50.649 -48.4,50.649 ; -47.674,47.612 -40.872,47.612 -47.674,47.612 ; -42.721,48.338 -40.872,48.338 -42.721,48.338 ; -42.721,48.668 -40.872,48.668 -42.721,48.668 ; -42.721,49.197 -40.872,49.197 -42.721,49.197 ; -42.721,49.197 -40.872,49.329 -42.721,49.395 ; -42.721,49.395 -40.872,49.395 -42.721,49.395 ; -42.721,49.989 -40.872,49.989 -42.721,49.989 ; -42.721,50.451 -40.872,50.451 -42.721,50.451 ; -42.721,50.649 -40.872,50.649 -42.721,50.649 ; -42.721,50.848 -40.872,50.848 -42.721,50.848 ; -42.721,51.178 -40.872,51.178 -42.721,51.178 ; -91.788,52.036 -85.383,52.036 -91.788,52.036 ; -91.788,52.366 -85.383,52.366 -91.788,52.366 ; -89.081,47.083 -88.09,47.083 -89.081,47.083 ; -89.081,47.215 -88.09,47.215 -89.081,47.215 ; -89.081,47.347 -88.09,47.347 -89.081,47.347 ; -89.081,47.479 -88.09,47.479 -89.081,47.479 ; -89.081,47.744 -88.09,47.744 -89.081,47.744 ; -89.081,47.876 -88.09,47.876 -89.081,47.876 ; -89.081,48.074 -88.09,48.074 -89.081,48.074 ; -89.081,48.47 -88.09,48.47 -89.081,48.47 ; -89.081,48.8 -88.09,48.8 -89.081,48.8 ; -89.081,49.527 -88.09,49.527 -89.081,49.527 ; -89.081,49.659 -88.09,49.659 -89.081,49.659 ; -89.081,49.923 -88.09,49.923 -89.081,49.923 ; -89.081,50.517 -88.09,50.517 -89.081,50.517 ; -89.081,50.781 -88.09,50.781 -89.081,50.781 ; -89.081,50.914 -88.09,50.914 -89.081,50.914 ; -89.081,51.046 -88.09,51.046 -89.081,51.046 ; -89.081,51.244 -88.09,51.244 -89.081,51.244 ; -89.081,51.64 -88.09,51.64 -89.081,51.64 ; -89.081,51.772 -88.09,51.772 -89.081,51.772 ; -84.854,47.612 -83.864,47.612 -84.854,47.612 ; -84.854,48.404 -83.864,48.404 -84.854,48.404 ; -84.854,48.536 -83.864,48.536 -84.854,48.536 ; -84.854,48.668 -83.864,48.668 -84.854,48.668 ; -84.854,48.8 -83.864,48.8 -84.854,48.8 ; -84.854,49.064 -83.864,49.064 -84.854,49.064 ; -84.854,49.395 -83.864,49.395 -84.854,49.395 ; -84.854,49.527 -83.864,49.527 -84.854,49.527 ; -84.854,50.055 -83.864,50.055 -84.854,50.055 ; -84.854,50.187 -83.864,50.187 -84.854,50.187 ; -84.854,50.319 -83.864,50.319 -84.854,50.319 ; -84.854,50.781 -83.864,50.781 -84.854,50.781 ; -84.854,50.914 -83.864,50.914 -84.854,50.914 ; -84.854,51.178 -83.864,51.178 -84.854,51.178 ; -84.854,51.31 -83.864,51.31 -84.854,51.31 ; -84.854,51.64 -83.864,51.64 -84.854,51.64 ; -84.788,51.904 -78.052,51.904 -84.788,51.904 ; -84.788,52.036 -78.052,52.036 -84.788,52.036 ; -84.722,52.168 -78.118,52.168 -84.722,52.168 ; -84.656,47.149 -78.184,47.149 -84.656,47.149 ; -84.656,52.3 -78.184,52.3 -84.656,52.3 ; -84.524,46.951 -78.382,46.951 -84.524,46.951 ; -82.873,43.187 -81.024,43.187 -82.873,43.187 ; -82.873,43.319 -81.024,43.319 -82.873,43.319 ; -82.807,44.904 -81.024,44.904 -82.807,44.904 ; -82.279,43.913 -81.024,43.913 -82.279,43.913 ; -82.279,44.045 -81.024,44.045 -82.279,44.045 ; -81.354,43.847 -81.024,43.847 -81.354,43.847 ; -80.496,44.772 -78.713,44.772 -80.496,44.772 ; -80.43,43.385 -79.967,43.385 -80.43,43.385 ; -80.297,43.451 -79.901,43.451 -80.297,43.451 ; -80.165,43.583 -79.769,43.583 -80.165,43.583 ; -80.033,43.715 -79.637,43.715 -80.033,43.715 ; -79.043,43.253 -78.713,43.253 -79.043,43.253 ; -79.043,44.31 -78.713,44.31 -79.043,44.31 ; -79.043,44.442 -78.713,44.442 -79.043,44.442 ; -78.977,47.612 -78.052,47.612 -78.977,47.612 ; -78.977,47.876 -77.986,47.876 -78.977,47.876 ; -78.977,48.008 -77.986,48.008 -78.977,48.008 ; -78.977,48.14 -77.986,48.14 -78.977,48.14 ; -78.977,48.866 -77.986,48.866 -78.977,48.866 ; -78.977,48.998 -77.986,48.998 -78.977,48.998 ; -78.977,49.197 -77.986,49.197 -78.977,49.197 ; -78.977,49.461 -77.986,49.461 -78.977,49.461 ; -78.977,49.725 -77.986,49.725 -78.977,49.725 ; -78.977,49.857 -77.986,49.857 -78.977,49.857 ; -78.977,50.385 -77.986,50.385 -78.977,50.385 ; -78.977,50.517 -77.986,50.517 -78.977,50.517 ; -78.977,50.98 -77.986,50.98 -78.977,50.98 ; -78.977,51.574 -77.986,51.574 -78.977,51.574 ; -78.118,44.045 -77.788,44.045 -78.118,44.045 ; -78.118,44.64 -77.788,44.64 -78.118,44.64 ; -78.052,43.187 -76.269,43.187 -78.052,43.187 ; -77.194,48.272 -76.203,48.272 -77.194,48.272 ; -77.194,48.8 -76.203,48.8 -77.194,48.8 ; -77.194,50.98 -76.137,50.98 -77.194,50.98 ; -77.194,51.244 -76.137,51.244 -77.194,51.244 ; -77.128,49.13 -76.137,49.13 -77.128,49.13 ; -76.995,47.215 -71.118,47.215 -76.995,47.215 ; -76.929,49.461 -71.118,49.461 -76.929,49.461 ; -76.599,70.792 -74.354,70.792 -76.599,70.792 ; -76.533,71.188 -74.42,71.188 -76.533,71.188 ; -76.467,43.781 -76.137,43.781 -76.467,43.781 ; -76.467,44.31 -76.137,44.31 -76.467,44.31 ; -76.467,44.442 -76.137,44.442 -76.467,44.442 ; -76.467,44.706 -76.137,44.706 -76.467,44.706 ; -76.467,44.838 -76.137,44.838 -76.467,44.838 ; -76.467,70.263 -73.627,70.263 -76.467,70.263 ; -76.335,70.131 -73.429,70.131 -76.335,70.131 ; -75.873,44.838 -73.892,44.838 -75.873,44.838 ; -75.08,43.121 -74.684,43.121 -75.08,43.121 ; -75.08,43.253 -74.684,43.253 -75.08,43.253 ; -74.09,69.537 -58.504,69.537 -74.09,69.537 ; -73.627,43.385 -73.297,43.385 -73.627,43.385 ; -73.627,44.508 -73.297,44.508 -73.627,44.508 ; -73.627,44.904 -73.297,44.904 -73.627,44.904 ; -73.297,63.329 -72.307,63.329 -73.297,63.329 ; -73.297,63.461 -72.429,63.461 -73.297,63.461 ; -73.297,63.593 -72.439,63.593 -73.297,63.593 ; -73.297,63.725 -72.439,63.725 -73.297,63.725 ; -73.297,63.989 -72.439,63.989 -73.297,63.989 ; -73.297,64.584 -72.439,64.584 -73.297,64.584 ; -73.297,65.773 -72.439,65.773 -73.297,65.773 ; -73.297,66.103 -72.439,66.103 -73.297,66.103 ; -73.297,66.367 -59.363,66.367 -73.297,66.367 ; -73.297,66.697 -59.363,66.697 -73.297,66.697 ; -73.297,67.027 -59.363,67.027 -73.297,67.027 ; -73.297,67.291 -59.363,67.291 -73.297,67.291 ; -73.297,67.556 -59.363,67.556 -73.297,67.556 ; -73.297,68.678 -59.363,68.678 -73.297,68.678 ; -72.505,61.084 -60.155,61.084 -72.505,61.084 ; -72.241,70.197 -60.419,70.197 -72.241,70.197 ; -72.109,47.612 -71.118,47.612 -72.109,47.612 ; -72.109,47.81 -71.118,47.81 -72.109,47.81 ; -72.109,47.942 -71.118,47.942 -72.109,47.942 ; -72.109,48.668 -71.118,48.668 -72.109,48.668 ; -72.109,48.8 -71.118,48.8 -72.109,48.8 ; -72.109,48.998 -71.118,48.998 -72.109,48.998 ; -72.109,50.451 -71.118,50.451 -72.109,50.451 ; -72.109,50.649 -71.118,50.649 -72.109,50.649 ; -72.109,50.781 -71.118,50.781 -72.109,50.781 ; -72.109,51.046 -71.118,51.046 -72.109,51.046 ; -72.109,51.178 -71.118,51.178 -72.109,51.178 ; -72.109,51.64 -71.118,51.64 -72.109,51.64 ; -71.976,43.583 -71.646,43.583 -71.976,43.583 ; -71.976,43.847 -71.646,43.847 -71.976,43.847 ; -71.976,43.979 -71.646,43.979 -71.976,43.979 ; -71.976,44.508 -71.646,44.508 -71.976,44.508 ; -71.976,44.64 -71.646,44.64 -71.976,44.64 ; -71.609,63.812 -66.337,62.161 -61.099,63.788 -61.099,65.376 -71.609,65.376 -71.609,63.812 ; -71.382,44.904 -69.599,44.904 -71.382,44.904 ; -71.382,60.423 -61.278,60.423 -71.382,60.423 ; -71.316,70.726 -61.344,70.726 -71.316,70.726 ; -70.92,60.159 -61.74,60.159 -70.92,60.159 ; -70.92,70.924 -61.74,70.924 -70.92,70.924 ; -70.722,43.847 -69.599,43.847 -70.722,43.847 ; -70.458,71.188 -62.203,71.188 -70.458,71.188 ; -70.391,59.829 -62.269,59.829 -70.391,59.829 ; -70.325,48.14 -69.335,48.14 -70.325,48.14 ; -70.325,48.272 -69.335,48.272 -70.325,48.272 ; -70.325,48.602 -69.335,48.602 -70.325,48.602 ; -70.325,48.734 -69.335,48.734 -70.325,48.734 ; -70.325,49.725 -69.335,49.725 -70.325,49.725 ; -70.325,50.781 -69.335,50.781 -70.325,50.781 ; -70.259,51.508 -69.335,51.508 -70.259,51.508 ; -70.259,51.838 -69.335,51.838 -70.259,51.838 ; -69.995,59.631 -62.665,59.631 -69.995,59.631 ; -69.995,71.452 -62.665,71.452 -69.995,71.452 ; -69.929,43.583 -69.599,43.583 -69.929,43.583 ; -69.929,43.781 -69.599,43.781 -69.929,43.781 ; -69.929,44.244 -69.599,44.244 -69.929,44.244 ; -69.929,44.376 -69.599,44.376 -69.929,44.376 ; -69.929,46.951 -63.787,46.951 -69.929,46.951 ; -69.863,52.499 -63.854,52.499 -69.863,52.499 ; -68.807,72.178 -63.854,72.178 -68.807,72.178 ; -67.948,58.442 -64.712,58.442 -67.948,58.442 ; -67.882,43.121 -66.033,43.121 -67.882,43.121 ; -67.882,43.253 -66.033,43.253 -67.882,43.253 ; -67.882,44.772 -66.033,44.772 -67.882,44.772 ; -67.882,44.904 -66.099,44.904 -67.882,44.904 ; -67.882,72.707 -64.778,72.707 -67.882,72.707 ; -67.486,58.178 -65.174,58.178 -67.486,58.178 ; -67.486,72.905 -65.174,72.905 -67.486,72.905 ; -67.486,76.009 -65.24,76.009 -67.486,76.009 ; -67.486,76.207 -65.24,76.207 -67.486,76.207 ; -67.42,75.745 -65.24,75.745 -67.42,75.745 ; -67.222,75.414 -65.438,75.414 -67.222,75.414 ; -67.156,57.98 -65.505,57.98 -67.156,57.98 ; -67.023,75.216 -65.637,75.216 -67.023,75.216 ; -66.825,75.084 -65.835,75.084 -66.825,75.084 ; -66.759,73.962 -65.901,73.962 -66.759,73.962 ; -66.759,74.556 -65.901,74.556 -66.759,74.556 ; -66.759,74.754 -65.901,74.754 -66.759,74.754 ; -66.429,43.385 -66.033,43.385 -66.429,43.385 ; -66.429,43.847 -66.033,43.847 -66.429,43.847 ; -66.429,44.177 -66.033,44.177 -66.429,44.177 ; -66.429,44.31 -66.033,44.31 -66.429,44.31 ; -66.429,44.442 -66.033,44.442 -66.429,44.442 ; -65.505,43.121 -65.174,43.121 -65.505,43.121 ; -65.505,43.253 -65.174,43.253 -65.505,43.253 ; -65.505,43.517 -65.174,43.517 -65.505,43.517 ; -65.505,43.649 -65.174,43.649 -65.505,43.649 ; -65.505,44.244 -65.174,44.244 -65.505,44.244 ; -65.505,44.508 -65.174,44.508 -65.505,44.508 ; -64.382,47.744 -63.457,47.744 -64.382,47.744 ; -64.382,47.876 -63.457,47.876 -64.382,47.876 ; -64.382,48.206 -63.391,48.206 -64.382,48.206 ; -64.382,48.47 -63.391,48.47 -64.382,48.47 ; -64.382,48.602 -63.391,48.602 -64.382,48.602 ; -64.382,48.734 -63.391,48.734 -64.382,48.734 ; -64.382,48.866 -63.391,48.866 -64.382,48.866 ; -64.382,49.659 -63.391,49.659 -64.382,49.659 ; -64.382,49.791 -63.391,49.791 -64.382,49.791 ; -64.382,50.055 -63.391,50.055 -64.382,50.055 ; -64.382,50.649 -63.391,50.649 -64.382,50.649 ; -64.382,50.781 -63.391,50.781 -64.382,50.781 ; -64.382,51.046 -63.391,51.046 -64.382,51.046 ; -64.382,51.442 -63.457,51.442 -64.382,51.442 ; -64.382,51.574 -63.457,51.574 -64.382,51.574 ; -63.721,43.121 -63.391,43.121 -63.721,43.121 ; -63.721,43.253 -63.391,43.253 -63.721,43.253 ; -63.721,43.385 -63.391,43.385 -63.721,43.385 ; -63.721,43.715 -63.391,43.715 -63.721,43.715 ; -63.721,44.442 -63.391,44.442 -63.721,44.442 ; -63.721,44.838 -63.391,44.838 -63.721,44.838 ; -63.127,44.772 -61.08,44.772 -63.127,44.772 ; -63.127,44.904 -61.146,44.904 -63.127,44.904 ; -62.599,50.253 -61.608,50.253 -62.599,50.253 ; -62.599,51.244 -61.608,51.244 -62.599,51.244 ; -62.599,51.376 -61.608,51.376 -62.599,51.376 ; -62.533,49.593 -56.589,49.593 -62.533,49.593 ; -62.533,49.725 -56.589,49.725 -62.533,49.725 ; -62.467,52.234 -56.589,52.234 -62.467,52.234 ; -62.335,52.366 -56.589,52.366 -62.335,52.366 ; -62.269,43.121 -61.938,43.121 -62.269,43.121 ; -62.269,43.253 -61.938,43.253 -62.269,43.253 ; -62.269,43.385 -61.938,43.385 -62.269,43.385 ; -62.269,44.045 -61.938,44.045 -62.269,44.045 ; -62.269,44.574 -61.938,44.574 -62.269,44.574 ; -62.136,47.612 -60.816,47.612 -62.136,47.612 ; -60.287,64.584 -59.363,64.584 -60.287,64.584 ; -60.287,65.112 -59.363,65.112 -60.287,65.112 ; -60.287,65.244 -59.363,65.244 -60.287,65.244 ; -60.287,65.905 -59.363,65.905 -60.287,65.905 ; -58.901,70.329 -56.193,70.329 -58.901,70.329 ; -58.636,70.461 -56.127,70.461 -58.636,70.461 ; -58.306,70.99 -56.061,70.99 -58.306,70.99 ; -58.24,44.31 -57.91,44.31 -58.24,44.31 ; -58.174,71.386 -56.259,71.386 -58.174,71.386 ; -57.58,46.753 -56.589,46.753 -57.58,46.753 ; -57.58,47.347 -56.589,47.347 -57.58,47.347 ; -57.58,47.744 -56.589,47.744 -57.58,47.744 ; -57.58,48.008 -56.589,48.008 -57.58,48.008 ; -57.58,48.404 -56.589,48.404 -57.58,48.404 ; -57.58,48.998 -56.589,48.998 -57.58,48.998 ; -57.58,50.517 -56.589,50.517 -57.58,50.517 ; -57.58,50.649 -56.589,50.649 -57.58,50.649 ; -57.58,50.781 -56.589,50.781 -57.58,50.781 ; -57.58,50.914 -56.589,50.914 -57.58,50.914 ; -57.58,51.046 -56.589,51.046 -57.58,51.046 ; -57.58,51.31 -56.589,51.31 -57.58,51.31 ; -57.58,51.442 -56.589,51.442 -57.58,51.442 ; -57.58,51.574 -56.589,51.574 -57.58,51.574 ; -57.382,44.442 -57.117,44.442 -57.382,44.442 ; -57.25,44.111 -56.919,44.111 -57.25,44.111 ; -57.183,43.979 -56.853,43.979 -57.183,43.979 ; -57.117,43.847 -56.787,43.847 -57.117,43.847 ; -56.985,43.715 -56.721,43.715 -56.985,43.715 ; -56.919,43.583 -56.589,43.583 -56.919,43.583 ; -56.853,43.385 -56.259,43.385 -56.853,43.385 ; -56.787,43.253 -56.325,43.253 -56.787,43.253 ; -56.721,43.121 -56.391,43.121 -56.721,43.121 ; -56.523,43.517 -56.193,43.517 -56.523,43.517 ; -56.457,43.649 -56.127,43.649 -56.457,43.649 ; -56.193,44.177 -55.797,44.177 -56.193,44.177 ; -56.061,44.31 -55.731,44.31 -56.061,44.31 ; -55.995,44.508 -55.599,44.508 -55.995,44.508 ; -55.797,44.772 -55.466,44.772 -55.797,44.772 ; -55.797,51.574 -49.325,51.574 -55.797,51.574 ; -55.797,51.97 -49.325,51.97 -55.797,51.97 ; -55.797,52.168 -49.325,52.168 -55.797,52.168 ; -55.797,52.499 -49.325,52.499 -55.797,52.499 ; -55.797,52.631 -49.325,52.631 -55.797,52.631 ; -55.136,43.121 -54.806,43.121 -55.136,43.121 ; -55.136,43.385 -54.806,43.385 -55.136,43.385 ; -55.136,43.517 -54.806,43.517 -55.136,43.517 ; -55.136,43.781 -54.806,43.781 -55.136,43.781 ; -55.136,44.574 -54.806,44.574 -55.136,44.574 ; -54.806,49.527 -49.325,49.527 -54.806,49.527 ; -54.806,49.659 -49.325,49.659 -54.806,49.659 ; -54.806,49.791 -49.325,49.791 -54.806,49.791 ; -54.806,50.055 -49.325,50.055 -54.806,50.055 ; -54.278,43.979 -52.495,43.979 -54.278,43.979 ; -54.278,44.111 -53.948,44.111 -54.278,44.111 ; -54.278,44.244 -53.948,44.244 -54.278,44.244 ; -54.146,43.385 -53.749,43.385 -54.146,43.385 ; -54.146,43.847 -52.495,43.847 -54.146,43.847 ; -54.014,43.517 -53.617,43.517 -54.014,43.517 ; -52.825,43.583 -52.495,43.583 -52.825,43.583 ; -52.825,44.111 -52.495,44.111 -52.825,44.111 ; -51.966,43.913 -51.57,43.913 -51.966,43.913 ; -51.966,44.045 -51.57,44.045 -51.966,44.045 ; -51.9,44.177 -51.57,44.177 -51.9,44.177 ; -51.702,44.64 -49.787,44.64 -51.702,44.64 ; -51.57,43.253 -49.787,43.253 -51.57,43.253 ; -51.174,46.753 -49.325,46.753 -51.174,46.753 ; -51.174,46.885 -49.325,46.885 -51.174,46.885 ; -51.174,47.413 -49.325,47.413 -51.174,47.413 ; -51.174,47.678 -49.325,47.678 -51.174,47.678 ; -51.174,48.008 -49.325,48.008 -51.174,48.008 ; -51.174,48.272 -49.325,48.272 -51.174,48.272 ; -51.174,48.404 -49.325,48.404 -51.174,48.404 ; -51.174,48.734 -49.325,48.734 -51.174,48.734 ; -51.174,50.98 -49.325,50.98 -51.174,50.98 ; -51.174,51.112 -49.325,51.112 -51.174,51.112 ; -51.174,51.244 -49.325,51.244 -51.174,51.244 ; -50.117,43.781 -49.787,43.781 -50.117,43.781 ; -50.117,44.376 -49.787,44.376 -50.117,44.376 ; -50.117,44.508 -49.787,44.508 -50.117,44.508 ; -48.532,49.461 -46.617,49.461 -48.532,49.461 ; -48.532,49.593 -46.617,49.593 -48.532,49.593 ; -48.532,49.725 -46.617,49.725 -48.532,49.725 ; -48.532,49.857 -46.617,49.857 -48.532,49.857 ; -48.532,49.989 -46.617,49.989 -48.532,49.989 ; -48.532,50.121 -46.617,50.121 -48.532,50.121 ; -48.466,50.253 -46.617,50.253 -48.466,50.253 ; -48.466,50.385 -46.551,50.385 -48.466,50.385 ; -48.466,50.517 -46.485,50.517 -48.466,50.517 ; -48.4,48.668 -46.221,48.668 -48.4,48.668 ; -48.4,50.781 -46.287,50.781 -48.4,50.781 ; -48.07,48.074 -40.872,48.074 -48.07,48.074 ; -48.004,47.942 -40.872,47.942 -48.004,47.942 ; -48.004,51.442 -40.872,51.442 -48.004,51.442 ; -47.938,51.574 -40.872,51.574 -47.938,51.574 ; -47.872,47.81 -40.872,47.81 -47.872,47.81 ; -47.806,51.706 -40.872,51.706 -47.806,51.706 ; -47.674,51.838 -40.872,51.838 -47.674,51.838 ; -47.542,47.479 -40.872,47.479 -47.542,47.479 ; -47.542,51.97 -40.872,51.97 -47.542,51.97 ; -47.41,52.036 -40.872,52.036 -47.41,52.036 ; -42.721,48.47 -40.872,48.47 -42.721,48.47 ; -42.721,48.932 -40.872,48.932 -42.721,48.932 ; -42.721,49.064 -40.872,49.064 -42.721,49.064 ; -42.721,49.527 -40.872,49.527 -42.721,49.527 ; -42.721,49.659 -40.872,49.659 -42.721,49.659 ; -42.721,49.791 -40.872,49.791 -42.721,49.791 ; -42.721,50.121 -40.872,50.121 -42.721,50.121 ; -42.721,50.253 -40.872,50.253 -42.721,50.253 ; -42.721,51.046 -40.872,51.046 -42.721,51.046
  Cmts.User w0.254: -3.03,36.86 ccw(c-4.39,36.86) -3.03,36.86
  Edge.Cuts w0.254: -142.5,0 ccw(c-139,0) -139,-3.5 0,-3.5 ccw(c0,0) 3.5,0 3.475,94.975 ccw(c-0.025,94.975) -0.025,98.475 -139,98.5 ccw(c-139,95) -142.5,95 -142.5,0

## Polygon pours and split planes (outlines as drawn)
+15V on F.Cu "F.Cu-+15V-1" (solid, remove dead copper, pour order 30953): -12.79,2.955 -12.79,4.93 -13.3,5.44 -16.15,5.44 -16.155,4.73 -15.4,3.78 -13.38,3.76 -13.38,4.23 -13.38,2.95
GND on F.Cu "F.Cu-GND-191" (solid, remove dead copper, pour order 30954): 3.566,32.271 -20.243,32.287 -20.281,23.019 -38.352,23.048 -38.566,-3.426 3.49,-3.49
+12V on F.Cu "F.Cu-+12V-3" (solid, remove dead copper, pour order 30956): -31.17,11.175 -30.19,11.175 -30.19,13.35 -20.8,13.36 -20.83,18.78 -17.52,18.73 -17.54,9.77 -20.59,6.62 -22.06,5.15 -25.93,5.15 -30.305,9.525 -31.17,9.525
Net-(U16-SW) on F.Cu "F.Cu-Net-(U16-SW)-1" (solid, remove dead copper, pour order 30957): -5.54,24.54 -5.54,23.66 -4.58,23.65 -4.58,22.99 -6.66,22.98 -8.22,25.41 -8.22,25.9 -6.89,25.92
GND on F.Cu "F.Cu-GND-192" (solid, remove dead copper, pour order 30959): -142.44,-3.53 -37.274,-3.494 -37.187,23.421 -20.213,23.467 -13.337,31.018 3.497,30.97 3.49,98.5 -142.5,98.5
Net-(U16-SW) on F.Cu "F.Cu-Net-(U16-SW)" (solid, remove dead copper, pour order 30960): -8.91,23.93 -11.1,23.93 -11.1,26.07 -10.94,26.23 -9.82,26.23 -9.04,25.45 -9.04,24.79 -8.91,24.66
VDC on F.Cu "F.Cu-VDC-1" (solid, remove dead copper, pour order 30961): 20 vertices, not listed, extent -16.76,5.64 3.3,41.835
VDC on F.Cu "F.Cu-VDC" (solid, remove dead copper, pour order 30962): -7.46,26.46 -11.24,26.455 -11.23,31.42 -7.81,31.43 -7.81,34.57 -1.6,34.57 -1.6,29.63 -8.72,29.64 -8.725,27.055 -7.438,27.055
VDC on F.Cu "F.Cu-VDC-3" (solid, remove dead copper, pour order 30965): -23.99,18.75 -29.445,18.75 -29.445,21.035 -29.335,21.145 -25.875,21.145 -25.555,20.825 -25.555,19.365 -25.54,19.35 -23.99,19.35
+5V on F.Cu "F.Cu-+5V-11" (solid, remove dead copper, pour order 30967): -33.07,15.91 -25.78,15.93 -25.72,13.96 -25.78,13.51 -33.3,13.53 -33.3,13.96 -33.3,15.66
+5V on F.Cu "F.Cu-+5V-13" (solid, remove dead copper, pour order 30969): -70.57,16.98 -71.58,17.01 -71.59,15.46 -70.52,15.45 -70.52,16.145 -68.525,16.145 -68.525,17.93 -69.62,17.93